# EAGLE board AnalogEx_1RedLedFadeInFadeOutUSB (EAGLE 7.6.0)

Size 26 x 19 mm. Coordinates in mm from the lower left corner, seen from the top.
Outline: 0,0 26,0 26,19 0,19 0,0
Copper layers (1*16): Top 0.035mm / dielectric 1.5mm / Bottom 0.035mm
Design rules "default": minimum track width 10mil, minimum drill 24mil, track to track 8mil, track to pad 8mil, pad to pad 8mil, via to via 8mil, smd to smd 8mil, copper to edge 40mil, drill to drill 8mil, minimum pad ring 10mil, minimum via ring 8mil, stop-mask expansion 4mil, vias tented up to drill 0mil, thermal gap 10mil

## Footprints (pad centres in the part's own frame; a part is rotated, then mirrored left to right if it is on the bottom)
SOT23-BEC = smd 1 x 1.4: B -0.95,-1.1; C 0,1.1; E 0.95,-1.1
C025-030X050 = drill 0.813 pad 1.422 octagon: 1 -1.27,0; 2 1.27,0
DIL08 = drill 0.813 pad 1.27: 1 -3.81,-3.81; 2 -1.27,-3.81; 3 1.27,-3.81; 4 3.81,-3.81; 5 3.81,3.81; 6 1.27,3.81; 7 -1.27,3.81; 8 -3.81,3.81
R1206 = smd 1.6 x 1.803: 1 -1.422,0; 2 1.422,0
LED5MM = drill 0.813 pad 1.676 octagon: A -1.27,0; K 1.27,0
MOLEX_480371000 = smd 1.2 x 2: 1 3.5,2.6; 2 1,2.6; 3 -1,2.6; 4 -3.5,2.6 | drill 2.5: M1 -5.7,0; M2 5.7,0 | hole 1.1: -2.25,0; 2.25,0

## Placement (x,y rotation side)
2N3904_NPN  [SOT23-BEC]  19,11 0 top
C1_100UF  [C025-030X050]  23,6.5 180 top
C1_100UF_LED  [C025-030X050]  3,16.5 0 top
IC1  NE555N  [DIL08]  10,26.5 270 top  (outside the outline)
R1_4.7K  [R1206]  3,1.3 0 top
R2_47K  [R1206]  3,6 180 top
R_100O  [R1206]  3,10 0 top
R_470K  [R1206]  23,1.3 0 top
RED_LED  [LED5MM]  23,15 0 top
X1  USB-A  [MOLEX_480371000]  13,4.05 0 top

## Library data of the parts
2N3904_NPN = transistor
C1_100UF C1_100UF_LED R1_4.7K R2_47K R_100O R_470K RED_LED X1 = adafruit
IC1 = linear

## Nets
GND: 2N3904_NPN.E C1_100UF.1 IC1.1 R_100O.1 X1.4
N$1: IC1.7 R1_4.7K.1 R2_47K.2
N$2: C1_100UF_LED.2 R_100O.2
N$3: 2N3904_NPN.B C1_100UF_LED.1 R_470K.2
N$4: 2N3904_NPN.C RED_LED.K
THRESHOLD: C1_100UF.2 IC1.2 IC1.6 R2_47K.1
TMR555_OUTPUT: IC1.3 R_470K.1
VCC: IC1.4 IC1.8 R1_4.7K.2 RED_LED.A X1.1

## Tracks (layer width: path | path; a pad name or v marks a point on that pad's centre or on a via)
GND  (4 unrouted)
N$1  (2 unrouted)
N$2  (1 unrouted)
N$3  (2 unrouted)
N$4  (1 unrouted)
THRESHOLD  (3 unrouted)
TMR555_OUTPUT  (1 unrouted)
VCC  (4 unrouted)

## Text on the board
tNames: + | + | + | GND
bNames: MadeInTheUSB.net | PCBv1 - 2016.11